# EAGLE board Pinduino-Nano-WPC-TPL521-v0.3c-AR1 (EAGLE 7.7.0)
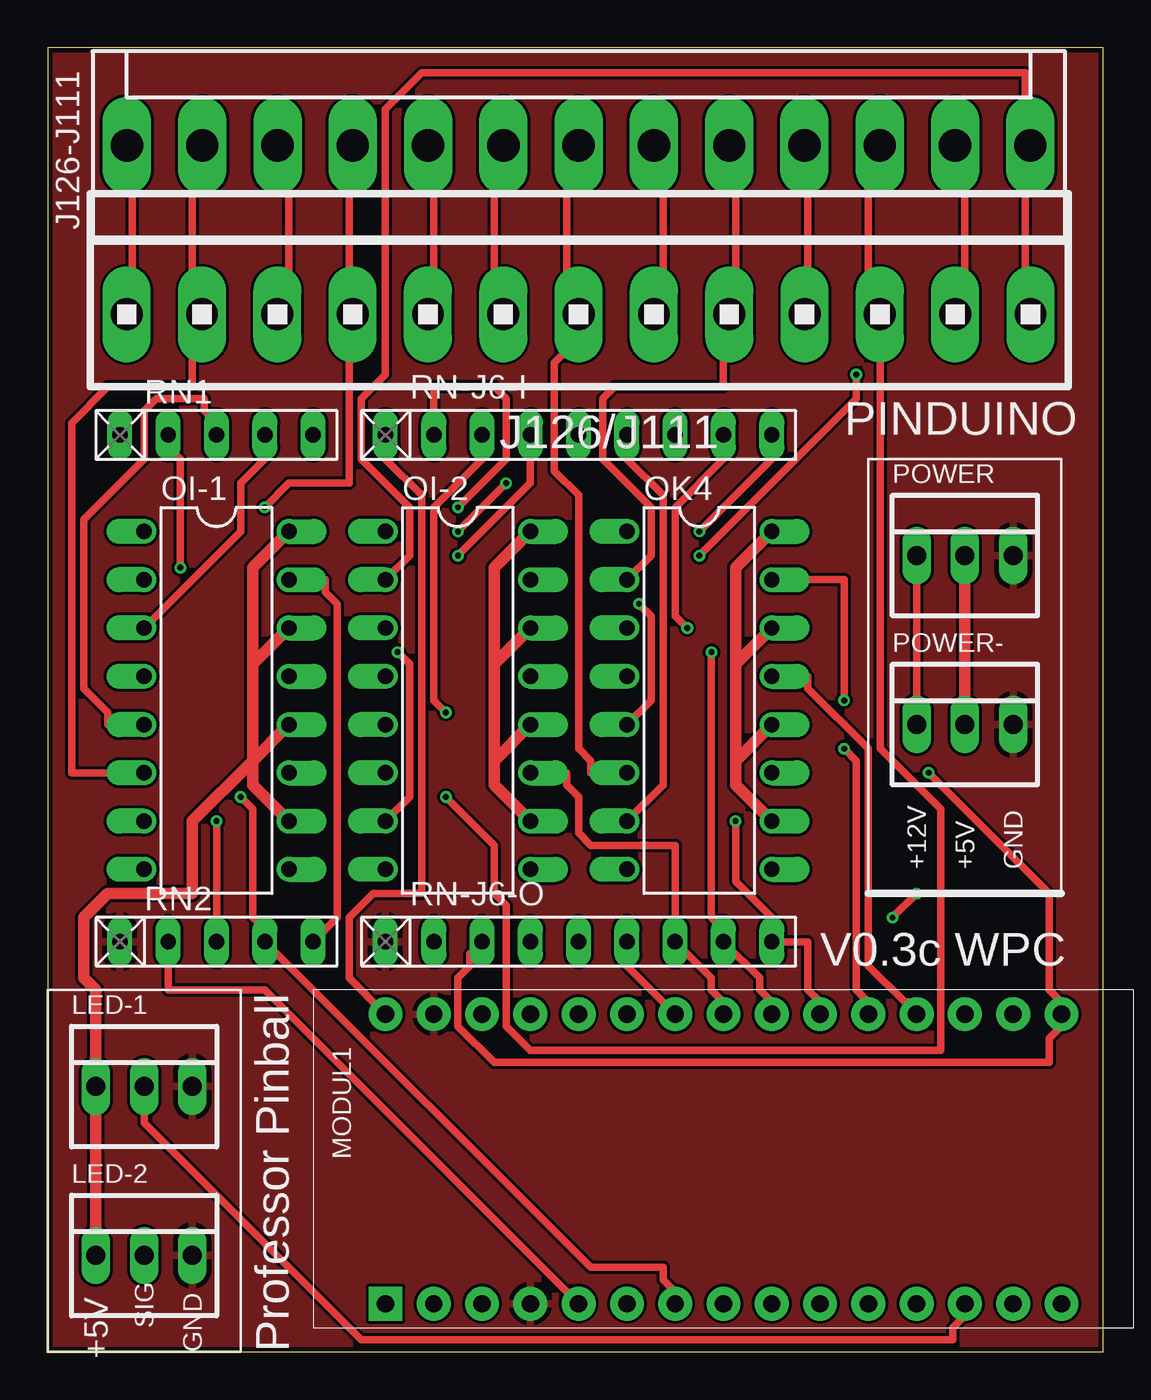
[diagram p0: board, top side]
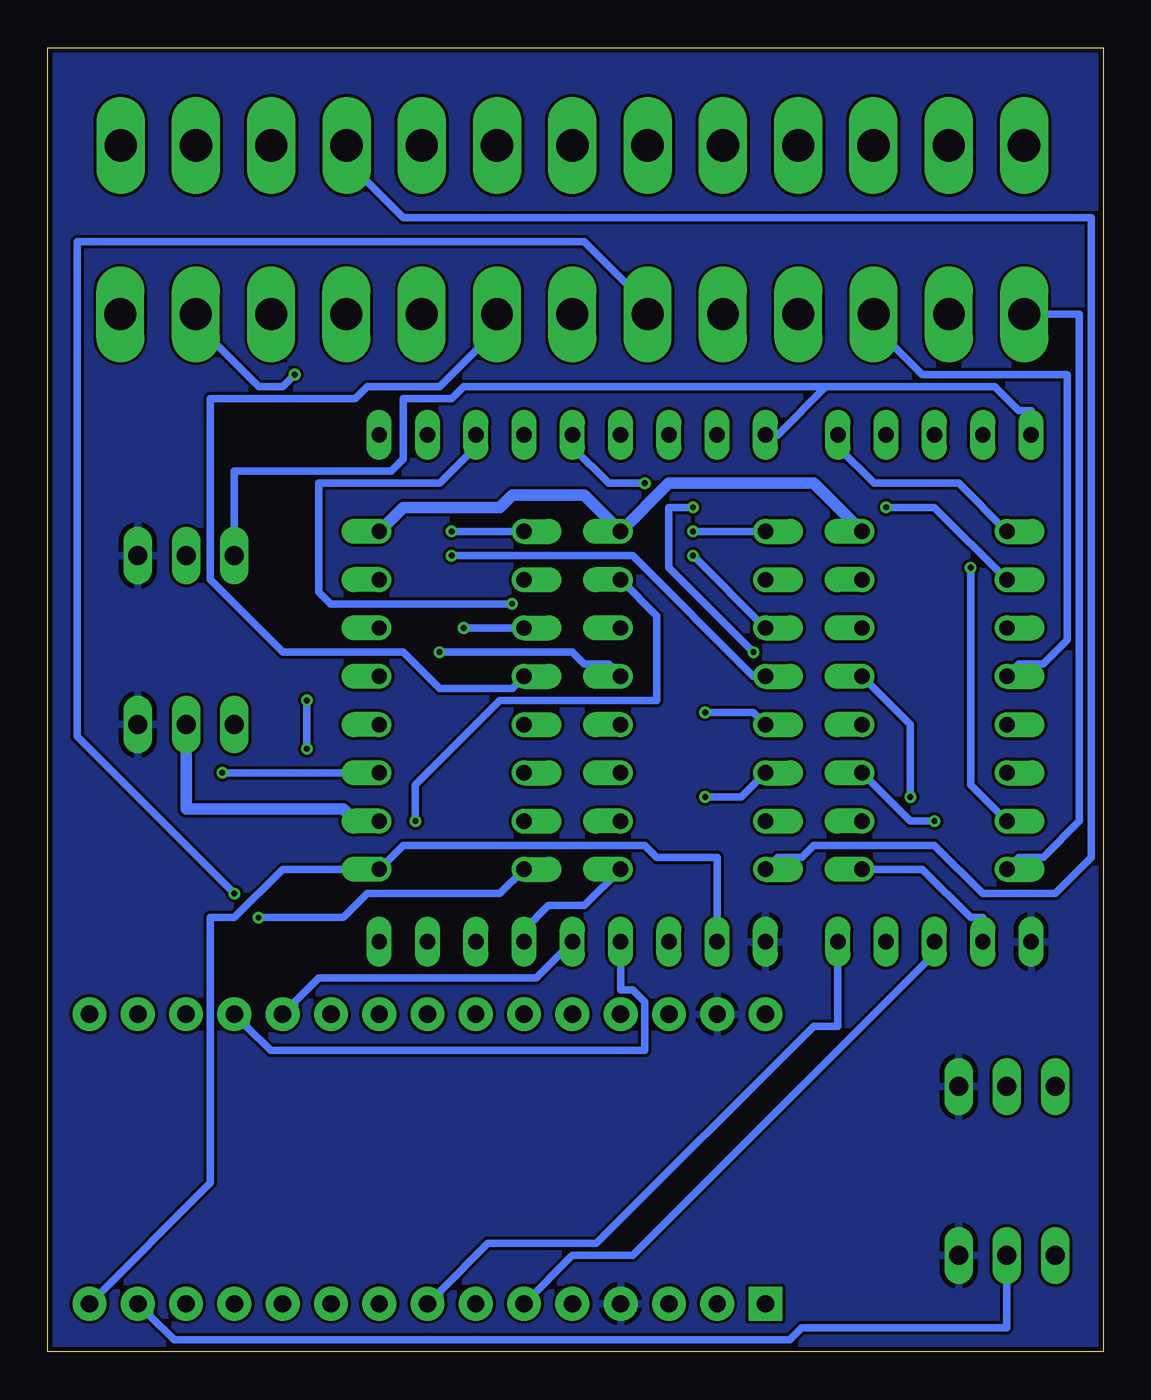
[diagram p1: board, bottom side, seen from below]

Size 55.55 x 68.65 mm. Coordinates in mm from the lower left corner, seen from the top.
Outline: 0,0 55.55,0 55.55,68.65 0,68.65 0,0
Copper layers (1*16): Top 0.035mm / dielectric 1.5mm / Bottom 0.035mm
Design rules "SeeedStudio_2layer_DRU_no_angle_20140221 copy": minimum track width 6mil, minimum drill 12mil, track to track 6mil, track to pad 6mil, pad to pad 6mil, via to via 6mil, smd to smd 0mil, copper to edge 10mil, drill to drill 10mil, minimum pad ring 10mil, minimum via ring 6mil, stop-mask expansion 2mil, vias tented up to drill 100mil, thermal gap 10mil
Net classes: 0 default: width 0.406 mm; 1 Power: width 0.61 mm; 2 GND: width 0.61 mm

## Footprints (pad centres in the part's own frame; a part is rotated, then mirrored left to right if it is on the bottom)
KK-156-13 = drill 1.7 pad 2.184 long: 1 -23.76,0; 2 -19.8,0; 3 -15.84,0; 4 -11.88,0; 5 -7.92,0; 6 -3.96,0; 7 0,0; 8 3.96,0; 9 7.92,0; 10 11.88,0; 11 15.84,0; 12 19.8,0; 13 23.76,0
1X13MTA = drill 1.676 long: 1 23.774,0; 2 19.812,0; 3 15.85,0; 4 11.887,0; 5 7.925,0; 6 3.962,0; 7 0,0; 8 -3.962,0; 9 -7.925,0; 10 -11.887,0; 11 -15.85,0; 12 -19.812,0; 13 -23.774,0
22-23-2031 = drill 1 long: 1 -2.54,0; 2 0,0; 3 2.54,0
ARDUINO_NANO2 = drill 0.914 pad 1.778 square: J1.1 -7.62,17.78 | drill 0.914 pad 1.778: J1.2 -7.62,15.24; J1.3 -7.62,12.7; J1.4 -7.62,10.16; J1.5 -7.62,7.62; J1.6 -7.62,5.08; J1.7 -7.62,2.54; J1.8 -7.62,0; J1.9 -7.62,-2.54; J1.10 -7.62,-5.08; J1.11 -7.62,-7.62; J1.12 -7.62,-10.16; J1.13 -7.62,-12.7; J1.14 -7.62,-15.24; J1.15 -7.62,-17.78; J2.1 7.62,17.78; J2.2 7.62,15.24; J2.3 7.62,12.7; J2.4 7.62,10.16; J2.5 7.62,7.62; J2.6 7.62,5.08; J2.7 7.62,2.54; J2.8 7.62,0; J2.9 7.62,-2.54; J2.10 7.62,-5.08; J2.11 7.62,-7.62; J2.12 7.62,-10.16; J2.13 7.62,-12.7; J2.14 7.62,-15.24; J2.15 7.62,-17.78
DIL16 = drill 0.813 offset: 1 -8.89,-3.81; 2 -6.35,-3.81; 3 -3.81,-3.81; 4 -1.27,-3.81; 5 1.27,-3.81; 6 3.81,-3.81; 7 6.35,-3.81; 8 8.89,-3.81; 9 8.89,3.81; 10 6.35,3.81; 11 3.81,3.81; 12 1.27,3.81; 13 -1.27,3.81; 14 -3.81,3.81; 15 -6.35,3.81; 16 -8.89,3.81
RN-5 = drill 0.813 long: 1 -5.08,0; 2 -2.54,0; 3 0,0; 4 2.54,0; 5 5.08,0
RN-9 = drill 0.813 long: 1 -10.16,0; 2 -7.62,0; 3 -5.08,0; 4 -2.54,0; 5 0,0; 6 2.54,0; 7 5.08,0; 8 7.62,0; 9 10.16,0

## Placement (x,y rotation side)
J126-J111  J126/J111  [KK-156-13]  27.94,63.5 0 top
J126/J111  J126/J111  [1X13MTA]  27.94,54.61 0 top
LED-1  [22-23-2031]  5.08,13.97 0 top
LED-2  [22-23-2031]  5.08,5.08 0 top
MODUL1  ARDUINO_NANO2  [ARDUINO_NANO2]  35.56,10.16 90 top
OI-1  TIL199  [DIL16]  8.89,34.29 270 top
OI-2  TIL199  [DIL16]  21.59,34.29 270 top
OK4  TIL199  [DIL16]  34.29,34.29 270 top
POWER  [22-23-2031]  48.26,41.91 0 top
POWER-  [22-23-2031]  48.26,33.02 0 top
RN1  10k  [RN-5]  8.89,48.26 0 top
RN2  10k  [RN-5]  8.89,21.59 0 top
RN-J6-I  10k  [RN-9]  27.94,48.26 0 top
RN-J6-O  10k  [RN-9]  27.94,21.59 0 top

## Library data of the parts
J126-J111 = con-molex; OC_FARNELL: unknown; OC_NEWARK: unknown
J126/J111 = con-amp
LED-1 LED-2 POWER POWER- = con-molex; MF: MOLEX; MPN: 22-23-2031; OC_FARNELL: 1462950; OC_NEWARK: 30C0862
MODUL1 = arduino; ANZAHL: 2; MODUL: TRUE; STECKX0: -76200; STECKX1: 76200; STECKY0: 177800; STECKY1: 177800
OI-1 OI-2 OK4 = optocoupler; MPN: TIL 199; OC_FARNELL: 1683370; OC_NEWARK: 05R6483
RN1 RN2 RN-J6-I RN-J6-O = resistor-net; OC_FARNELL: unknown; OC_NEWARK: unknown

## Nets
3V3: MODUL1.J2.14
+5V: MODUL1.J2.4
ARD+5V [Power]: LED-1.1 LED-2.1 OI-1.10 OI-1.12 OI-1.14 OI-1.16 OI-2.10 OI-2.12 OI-2.14 OI-2.16 OK4.10 OK4.12 OK4.14 OK4.16 POWER-.2 POWER.2
AREF: MODUL1.J2.13
GND: LED-1.3 LED-2.3 MODUL1.J1.4 MODUL1.J2.2 POWER-.3 POWER.3 RN2.1 RN-J6-O.1
N$1: MODUL1.J2.1 POWER-.1 POWER.1 RN1.1 RN-J6-I.1
N$2: MODUL1.J1.5 OI-1.9 RN2.2
N$4: OI-1.5 RN1.3
N$6: OI-1.1 RN1.5
N$7: OI-1.3 RN1.4
N$13: OI-1.7 RN1.2
N$18: MODUL1.J1.6 OI-1.11 RN2.3
N$19: J126-J111.3 J126/J111.11 OI-1.4
N$20: J126-J111.2 J126/J111.12 OI-1.6
N$21: J126-J111.12 J126/J111.2 OI-2.4
N$22: J126-J111.13 J126/J111.1 OI-2.2
N$23: J126-J111.4 J126/J111.10 OI-1.2
N$25: J126-J111.1 J126/J111.13 OI-1.8
N$27: J126-J111.9 J126/J111.5 OK4.2
N$28: MODUL1.J1.7 OI-1.13 RN2.4
N$29: OK4.1 RN-J6-I.9
N$30: OK4.3 RN-J6-I.8
N$31: OK4.5 RN-J6-I.7
N$32: OI-2.3 RN-J6-I.4
N$33: OI-2.1 RN-J6-I.5
N$34: OI-2.5 RN-J6-I.3
N$35: OK4.7 RN-J6-I.6
N$36: MODUL1.J2.8 OI-2.11 RN-J6-O.7
N$37: OI-2.7 RN-J6-I.2
N$38: MODUL1.J2.7 OI-2.9 RN-J6-O.6
N$39: MODUL1.J2.15 OK4.11 RN-J6-O.3
N$42: MODUL1.J2.12 OK4.13 RN-J6-O.4
N$43: MODUL1.J2.11 OK4.15 RN-J6-O.5
N$44: LED-2.2 MODUL1.J1.14
N$45: LED-1.2 MODUL1.J1.13
N$51: MODUL1.J1.8 OI-1.15 RN2.5
N$55: MODUL1.J2.9 OI-2.13 RN-J6-O.8
N$56: MODUL1.J2.10 OI-2.15 RN-J6-O.9
N$58: J126-J111.6 J126/J111.8 OK4.8
N$59: J126-J111.7 J126/J111.7 OK4.6
N$60: MODUL1.J1.15 OK4.9 RN-J6-O.2
N$62: J126-J111.8 J126/J111.6 OK4.4
N$64: J126-J111.5 J126/J111.9
N$65: J126-J111.10 J126/J111.4 OI-2.8
N$66: J126-J111.11 J126/J111.3 OI-2.6

## Tracks (layer width: path | path; a pad name or v marks a point on that pad's centre or on a via)
ARD+5V
  Top 0.61: POWER.2 POWER-.2 | OK4.10 36.2,29.84 36.2,31.12 | OK4.12 36.2,31.12 | 36.2,36.2 OK4.14 | 36.2,31.12 36.2,36.2 | OK4.16 36.2,41.27 36.2,36.2 | OI-2.10 23.49,29.84 23.49,31.12 | OI-2.12 23.49,31.12 | 23.49,36.2 OI-2.14 | 23.49,31.12 23.49,36.2 | OI-2.16 23.49,41.27 23.49,36.2 | LED-2.1 LED-1.1 2.54,19.05 1.91,19.68 1.91,22.86 3.18,24.13 7.62,24.13 7.62,27.94 10.8,31.12 | OI-1.10 10.8,29.84 10.8,31.12 | OI-1.12 10.8,31.12 | 10.8,36.2 OI-1.14 | 10.8,31.12 10.8,36.2 | OI-1.16 10.8,41.27 10.8,36.2
  Bottom 0.61: POWER-.2 48.26,28.58 40.01,28.58 39.37,27.94 OK4.10 | OI-1.16 15.24,45.72 22.86,45.72 OI-2.16 27.3,45.09 31.12,45.09 31.75,44.45 36.83,44.45 OK4.16
GND
  pour Top: -1.27,69.85 -1.27,-2.54 58.42,-2.54 58.42,69.85
  pour Bottom: -2.54,71.12 -2.54,-3.81 57.15,-3.81 57.15,71.12
N$1
  Top 0.406: POWER.1 POWER-.1 | MODUL1.J2.1 15.88,19.68 15.88,22.86 17.15,24.13 19.69,24.13 19.69,45.09 17.78,46.99 RN-J6-I.1
  Bottom 0.406: RN1.1 3.81,49.53 4.45,49.53 5.72,50.8 14.61,50.8 | 14.61,50.8 17.15,48.26 RN-J6-I.1 | POWER.1 45.72,46.35 37.46,46.35 36.83,46.99 36.83,50.16 34.29,50.16 33.65,50.8 14.61,50.8
N$2
  Top 0.406: MODUL1.J1.5 11.43,19.05 6.35,19.05 RN2.2
  Bottom 0.406: RN2.2 6.35,22.86 6.98,22.86 9.52,25.4 OI-1.9
N$4
  Top 0.406: OI-1.5 3.18,33.02 3.18,33.66 1.91,34.92 1.91,43.81 5.08,46.99 5.08,49.53 5.72,50.16 8.26,50.16 8.26,49.53 8.89,48.9 RN1.3
N$6
  Bottom 0.406: OI-1.1 7.62,45.72 12.06,45.72 13.97,47.62 RN1.5
N$7
  Top 0.406: OI-1.3 10.16,43.18 10.16,45.72 11.43,46.99 RN1.4
N$13  (via drill 0.3)
  Top 0.406: v6.98,41.27 6.98,46.99 6.35,47.62 RN1.2
  Bottom 0.406: OI-1.7 6.98,29.84 v6.98,41.27
N$18  (via drill 0.3)
  Top 0.406: v8.89,27.94 RN2.3
  Bottom 0.406: v8.89,27.94 10.16,27.94 OI-1.11 | MODUL1.J1.6 27.94,5.08 24.77,5.08 8.89,20.95 RN2.3
N$19
  Top 0.406: J126-J111.3 12.7,63.5 12.7,54.61 J126/J111.11
  Bottom 0.406: OI-1.4 4.45,36.2 3.18,36.2 1.91,37.47 1.91,51.44 9.52,51.44 12.7,54.61 J126/J111.11
N$20
  Top 0.406: OI-1.6 1.27,30.48 1.27,48.9 3.18,50.8 7.62,50.8 7.62,54.61 | 7.62,54.61 7.62,63.5 J126-J111.2 | 7.62,54.61 J126/J111.12
N$21  (via drill 0.3)
  Top 0.406: v34.29,41.91 42.54,50.16 v42.54,51.44 | J126-J111.12 48.26,63.5 48.26,54.61 J126/J111.2
  Bottom 0.406: OI-2.4 18.41,35.56 24.77,41.91 v34.29,41.91 | v42.54,51.44 43.18,50.8 44.45,50.8 48.26,54.61 J126/J111.2
N$22
  Top 0.406: OI-2.2 19.05,41.91 19.05,44.45 16.51,46.99 16.51,50.16 17.78,51.44 17.78,65.41 19.69,67.31 51.43,67.31 51.43,63.5 | 51.43,63.5 51.43,54.61 J126/J111.1 | 51.43,63.5 J126-J111.13
N$23  (via drill 0.3)
  Top 0.406: v11.43,44.45 12.7,45.72 15.88,45.72 15.88,54.61 | 15.88,54.61 15.88,63.5 J126-J111.4 | 15.88,54.61 J126/J111.10
  Bottom 0.406: OI-1.2 8.89,44.45 v11.43,44.45
N$25
  Top 0.406: J126-J111.1 4.45,63.5 4.45,54.61 J126/J111.13
  Bottom 0.406: OI-1.8 4.45,26.04 3.18,26.04 1.27,27.94 1.27,54.61 J126/J111.13
N$27
  Top 0.406: OK4.2 31.75,41.91 31.75,44.45 29.21,46.99 29.21,50.16 29.85,50.8 35.56,50.8 35.56,54.61 J126/J111.5 36.2,54.61 36.2,63.5 J126-J111.9
N$28  (via drill 0.3)
  Top 0.406: MODUL1.J1.7 33.02,3.18 32.38,3.81 32.38,4.45 28.58,4.45 RN2.4 11.43,22.23 10.8,22.86 10.8,28.58 v10.16,29.21
  Bottom 0.406: OI-1.13 10.16,33.02 v10.16,29.21
N$29  (via drill 0.3)
  Top 0.406: v34.29,43.18 38.1,46.99 RN-J6-I.9
  Bottom 0.406: v34.29,43.18 OK4.1
N$30  (via drill 0.3)
  Top 0.406: v33.65,38.1 33.02,38.73 33.02,44.45 35.56,46.99 RN-J6-I.8
  Bottom 0.406: v33.65,38.1 OK4.3
N$31  (via drill 0.3)
  Top 0.406: OK4.5 31.75,34.29 31.75,38.73 v31.12,39.37
  Bottom 0.406: v31.12,39.37 40.64,39.37 41.27,40.01 41.27,45.72 34.93,45.72 33.02,47.62 RN-J6-I.7
N$32  (via drill 0.3)
  Top 0.406: v21.59,41.91 25.4,45.72 RN-J6-I.4
  Bottom 0.406: v21.59,41.91 OI-2.3
N$33  (via drill 0.3)
  Top 0.406: v24.13,45.72 v21.59,43.18
  Bottom 0.406: v21.59,43.18 OI-2.1 | v24.13,45.72 26.04,45.72 27.94,47.62 RN-J6-I.5
N$34  (via drill 0.3)
  Top 0.406: v20.95,33.66 20.32,34.29 20.32,44.45 22.86,46.99 RN-J6-I.3
  Bottom 0.406: OI-2.5 18.41,33.66 v20.95,33.66
N$35
  Top 0.406: OK4.7 32.38,29.84 32.38,45.09 30.48,46.99 RN-J6-I.6
N$36
  Top 0.406: MODUL1.J2.8 35.56,18.41 34.93,19.05 34.93,19.68 RN-J6-O.7 33.02,26.67 28.58,26.67 27.94,27.3 27.94,29.21 27.3,29.84 27.3,30.48 OI-2.11
N$37  (via drill 0.3)
  Top 0.406: OI-2.7 19.05,29.21 19.05,36.2 v18.41,36.83 | v21.59,44.45 24.13,46.99 24.13,50.16 23.49,50.8 20.32,50.8 RN-J6-I.2
  Bottom 0.406: v18.41,36.83 22.86,41.27 22.86,44.45 v21.59,44.45
N$38
  Top 0.406: MODUL1.J2.7 30.48,20.32 RN-J6-O.6
  Bottom 0.406: OI-2.9 27.3,23.49 29.21,23.49 30.48,22.23 RN-J6-O.6
N$39  (via drill 0.3)
  Top 0.406: RN-J6-O.3 22.23,20.95 22.23,20.32 21.59,19.68 21.59,17.14 23.49,15.24 52.71,15.24 52.71,16.51 53.34,17.14 MODUL1.J2.15 53.34,18.41 52.71,19.05 52.71,24.13 v46.35,30.48
  Bottom 0.406: v46.35,30.48 OK4.11
N$42
  Top 0.406: OK4.13 40.01,35.56 40.01,34.92 43.18,31.75 43.18,20.32 45.09,18.41 45.72,18.41 MODUL1.J2.12
  Bottom 0.406: RN-J6-O.4 25.4,19.05 24.77,19.05 24.13,18.41 24.13,15.88 43.82,15.88 45.09,17.14 45.09,17.78 MODUL1.J2.12
N$43  (via drill 0.3)
  Top 0.406: OK4.15 41.91,40.64 v41.91,34.29 | v41.91,31.75 42.54,31.12 42.54,19.05 43.18,18.41 MODUL1.J2.11
  Bottom 0.406: RN-J6-O.5 29.85,19.68 41.27,19.68 42.54,18.41 42.54,17.78 MODUL1.J2.11 | v41.91,31.75 v41.91,34.29
N$44
  Bottom 0.406: LED-2.2 5.08,1.27 15.88,1.27 16.51,0.63 48.9,0.63 50.16,1.91 50.16,2.54 MODUL1.J1.14
N$45
  Top 0.406: LED-1.2 5.08,12.07 16.51,0.63 47.63,0.63 47.63,1.27 48.26,1.91 MODUL1.J1.13
N$51
  Top 0.406: OI-1.15 14.61,40.64 14.61,40.01 15.24,39.37 15.24,22.86 RN2.5
  Bottom 0.406: RN2.5 13.97,17.14 15.24,17.14 26.67,5.71 32.38,5.71 34.93,3.18 34.93,2.54 MODUL1.J1.8
N$55  (via drill 0.3)
  Top 0.406: MODUL1.J2.9 38.1,18.41 37.46,19.05 37.46,19.68 RN-J6-O.8 35.56,22.23 34.93,22.86 v34.93,36.83
  Bottom 0.406: OI-2.13 26.04,36.2 27.3,36.2 27.94,36.83 v34.93,36.83
N$56  (via drill 0.3)
  Top 0.406: MODUL1.J2.10 40.64,18.41 40.01,19.05 40.01,21.59 RN-J6-O.9 38.1,22.86 36.2,24.77 v36.2,27.94
  Bottom 0.406: OI-2.15 23.49,38.73 23.49,34.29 31.75,34.29 36.2,29.84 v36.2,27.94
N$58  (via drill 0.3)
  Top 0.406: v45.72,24.13 v44.45,22.86 | J126-J111.6 23.49,63.5 23.49,54.61 J126/J111.8
  Bottom 0.406: OK4.8 31.75,24.13 38.74,24.13 40.01,22.86 v44.45,22.86 | v45.72,24.13 53.98,32.38 53.98,58.42 27.3,58.42 23.49,54.61 J126/J111.8
N$59
  Top 0.406: OK4.6 28.58,30.48 28.58,31.12 27.94,31.75 27.94,45.09 26.67,46.35 26.67,52.07 27.3,52.71 | 27.3,52.71 27.94,53.34 J126/J111.7 27.3,52.71 | J126-J111.7 27.3,62.87 27.3,52.71
N$60
  Bottom 0.406: RN-J6-O.2 20.32,26.04 23.49,26.04 24.13,26.67 36.83,26.67 OK4.9 43.18,25.4 45.72,22.86 46.99,22.86 46.99,8.89 MODUL1.J1.15
N$62
  Top 0.406: J126-J111.8 32.38,63.5 32.38,54.61 J126/J111.6
  Bottom 0.406: OK4.4 31.12,34.92 34.93,34.92 36.83,36.83 43.18,36.83 46.99,40.64 46.99,50.16 39.37,50.16 38.74,50.8 34.93,50.8 32.38,53.34 32.38,54.61 J126/J111.6
N$64
  Top 0.406: J126/J111.9 20.32,54.61 20.32,63.5 J126-J111.5
N$65
  Top 0.406: J126/J111.4 40.01,54.61 40.01,63.5 J126-J111.10
  Bottom 0.406: OI-2.8 17.15,26.04 15.88,26.04 15.24,26.67 8.89,26.67 6.35,24.13 2.54,24.13 0.63,26.04 0.63,59.69 36.83,59.69 39.37,62.23 39.37,63.5 J126-J111.10
N$66  (via drill 0.3)
  Top 0.406: v20.95,29.21 23.49,26.67 23.49,24.13 24.13,23.49 24.13,17.14 25.4,15.88 46.99,15.88 46.99,28.58 43.82,31.75 43.82,54.61 J126/J111.3 43.18,54.61 43.18,63.5 J126-J111.11
  Bottom 0.406: OI-2.6 19.05,29.21 v20.95,29.21

## Text on the board
tNames: PINDUINO | +5V | +12V | GND | V0.3c WPC | +5V | SIG | GND | Professor Pinball